# EAGLE board 20161130-0004-gmt+2-attiny10-breakout-design-3-breakout (EAGLE 7.2.0)
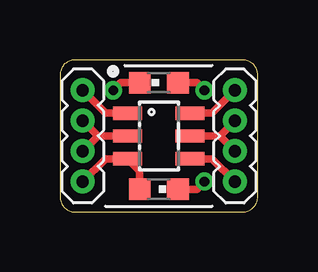
[diagram p0: board, top side]
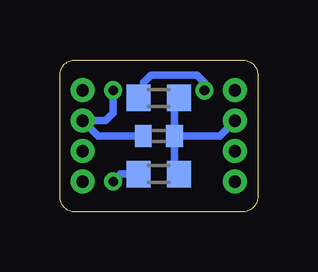
[diagram p1: board, bottom side, seen from below]

Size 8.26 x 6.35 mm. Coordinates in mm from the lower left corner, seen from the top.
Outline: 0,5.71 0,0.64 arc90 0.64,0 7.62,0 arc90 8.26,0.64 8.26,5.71 arc90 7.62,6.35 0.64,6.35 arc90 0,5.71
Copper layers (1*16): Top 0.0356mm / dielectric 1.5011mm / Bottom 0.0356mm
Design rules "oshpark-2layer *": minimum track width 6mil, minimum drill 13mil, track to track 6mil, track to pad 6mil, pad to pad 6mil, via to via 6mil, smd to smd 6mil, copper to edge 15mil, drill to drill 6mil, minimum pad ring 7mil, minimum via ring 7mil, stop-mask expansion 4mil, vias tented up to drill 20mil, thermal gap 10mil

## Footprints (pad centres in the part's own frame; a part is rotated, then mirrored left to right if it is on the bottom)
C0402 = smd 0.7 x 0.9: 1 -0.65,0; 2 0.65,0
SOT23-6 = smd 0.55 x 1.2: 1 -0.95,-1.3; 2 0,-1.3; 3 0.95,-1.3; 4 0.95,1.3; 5 0,1.3; 6 -0.95,1.3
1X04-1.27MM = drill 0.508 pad 1: 1 0,0; 2 1.27,0; 3 2.54,0; 4 3.81,0
CHIP-LED0603 = smd 0.9 x 0.9: A 0,-0.8; C 0,0.8
R0603 = smd 1 x 1.1: 1 -0.85,0; 2 0.85,0

## Placement (x,y rotation side)
C1  100nF  [C0402]  4.13,3.17 0 bottom
IC1  ATTINY10  [SOT23-6]  4.13,3.17 270 top
JP1  [1X04-1.27MM]  0.95,5.08 270 top
JP2  [1X04-1.27MM]  7.3,5.08 270 top
LED1  RED  [CHIP-LED0603]  4.13,5.4 90 top
LED2  YELLOW  [CHIP-LED0603]  4.13,0.95 270 top
R1  680  [R0603]  4.13,4.76 180 bottom
R2  680  [R0603]  4.13,1.59 180 bottom

## Library data of the parts
C1 IC1 LED1 LED2 R1 R2 = adafruit
JP1 JP2 = SparkFun-Connectors

## Nets
GND: C1.2 IC1.2 JP1.2 JP1.3 R1.1 R2.1
N$1: LED1.C R1.2
N$6: LED2.C R2.2
PB0: IC1.1 JP1.1
PB1: IC1.3 JP1.4 LED2.A
PB2: IC1.4 JP2.4
RST: IC1.6 JP2.1
VCC: C1.1 IC1.5 JP2.2 JP2.3 LED1.A

## Tracks (layer width: path | path; a pad name or v marks a point on that pad's centre or on a via)
GND
  Top 0.305: IC1.2 1.59,3.17 | 1.59,3.17 JP1.2 | JP1.3 1.59,3.17
  Bottom 0.305: C1.2 3.48,4.56 R1.1 | C1.2 3.48,1.79 R2.1 | C1.2 1.59,3.17 JP1.2
N$1  (via drill 0.4)
  Top 0.305: LED1.C 2.54,5.4 v2.22,5.08
  Bottom 0.305: v2.22,5.08 2.22,5.4 2.54,5.71 4.45,5.71 4.76,5.4 4.76,4.98 R1.2
N$6  (via drill 0.4)
  Top 0.305: LED2.C 5.71,0.95 v6.03,1.27
  Bottom 0.305: R2.2 5.71,1.59 v6.03,1.27
PB0
  Top 0.305: IC1.1 1.91,4.12 JP1.1
PB1
  Top 0.305: JP1.4 1.91,2.23 IC1.3 3.33,1.73 LED2.A
PB2
  Top 0.305: IC1.4 6.35,2.23 JP2.4
RST
  Top 0.305: IC1.6 6.35,4.12 JP2.1
VCC  (via drill 0.4)
  Top 0.305: IC1.5 6.67,3.17 | 6.67,3.17 JP2.2 | LED1.A 5.71,5.4 v6.03,5.08 | JP2.3 6.67,3.17
  Bottom 0.305: C1.1 6.67,3.17 JP2.2 6.35,3.81 6.03,4.13 v6.03,5.08